# Altium PCB ETML_A4_2L.PcbDoc (part 1 of 2)
Units mm, origin at the board's own origin, x right, y up, seen from the top; angles counter-clockwise.
Board outline 160 x 100 mm, 2 copper layers (Top Layer, Bottom Layer), stack 1.571 mm thick; 99 components, 40 nets, 218 pads, 32 vias.
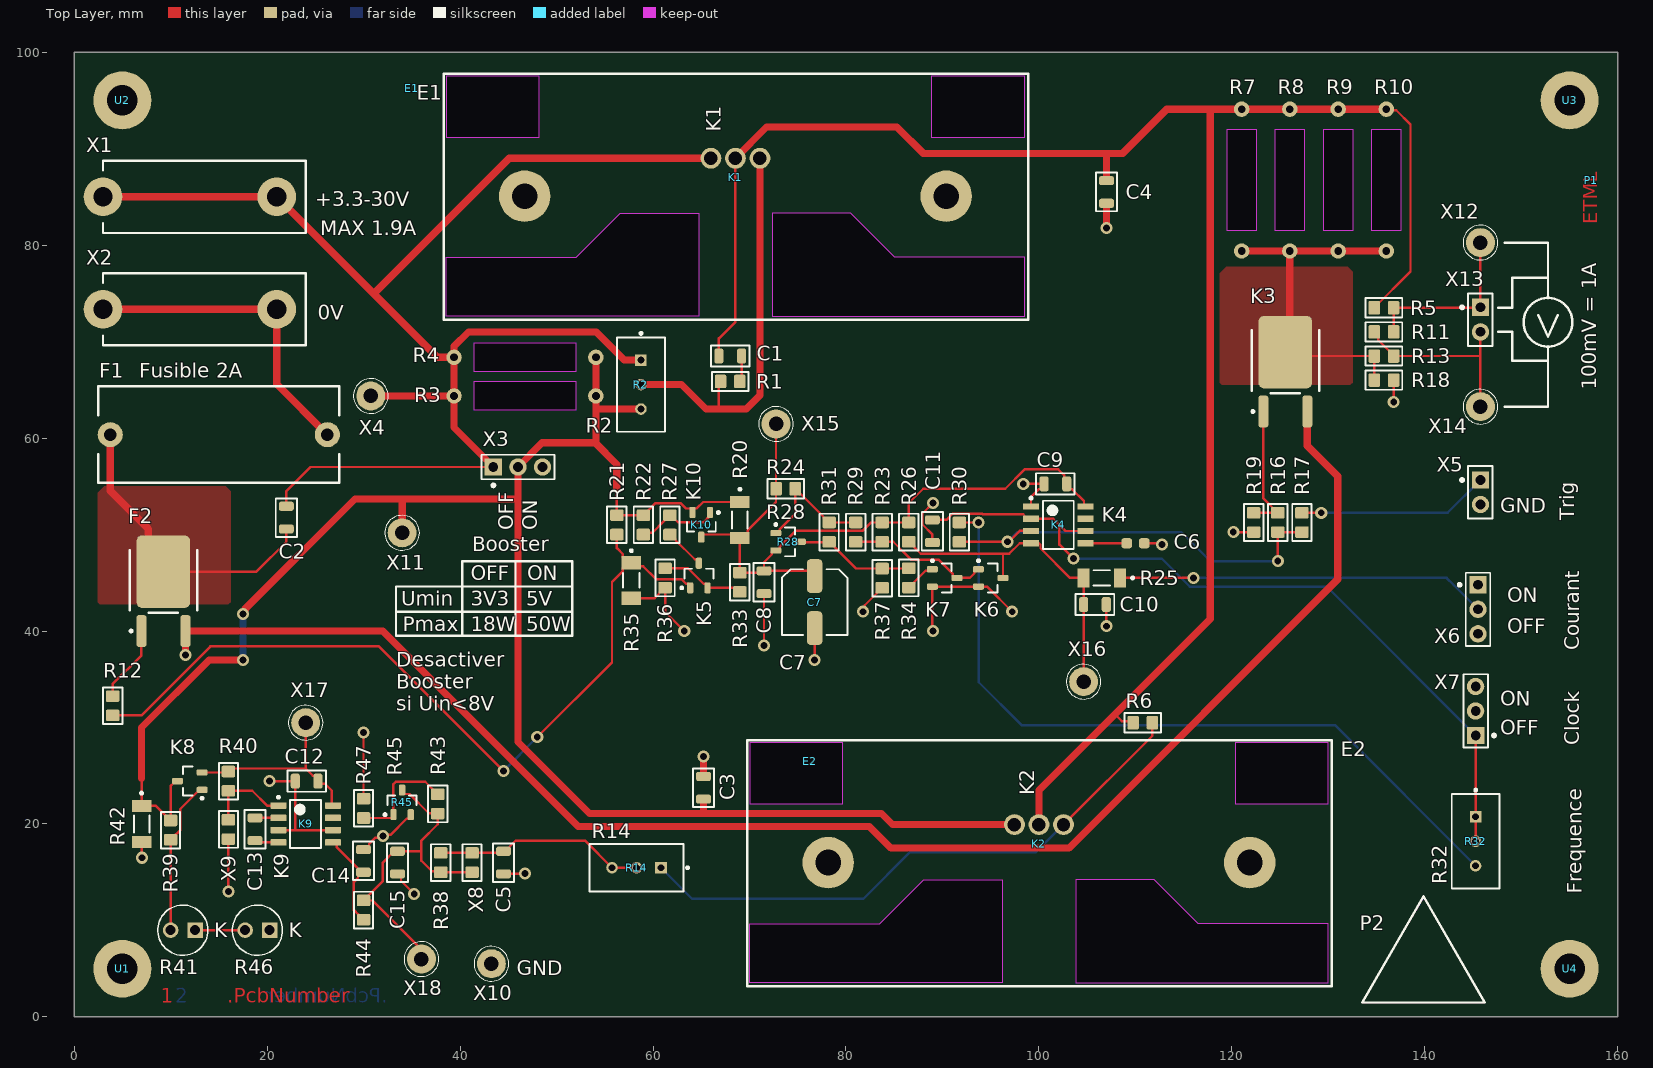
[diagram p0: Top Layer view]
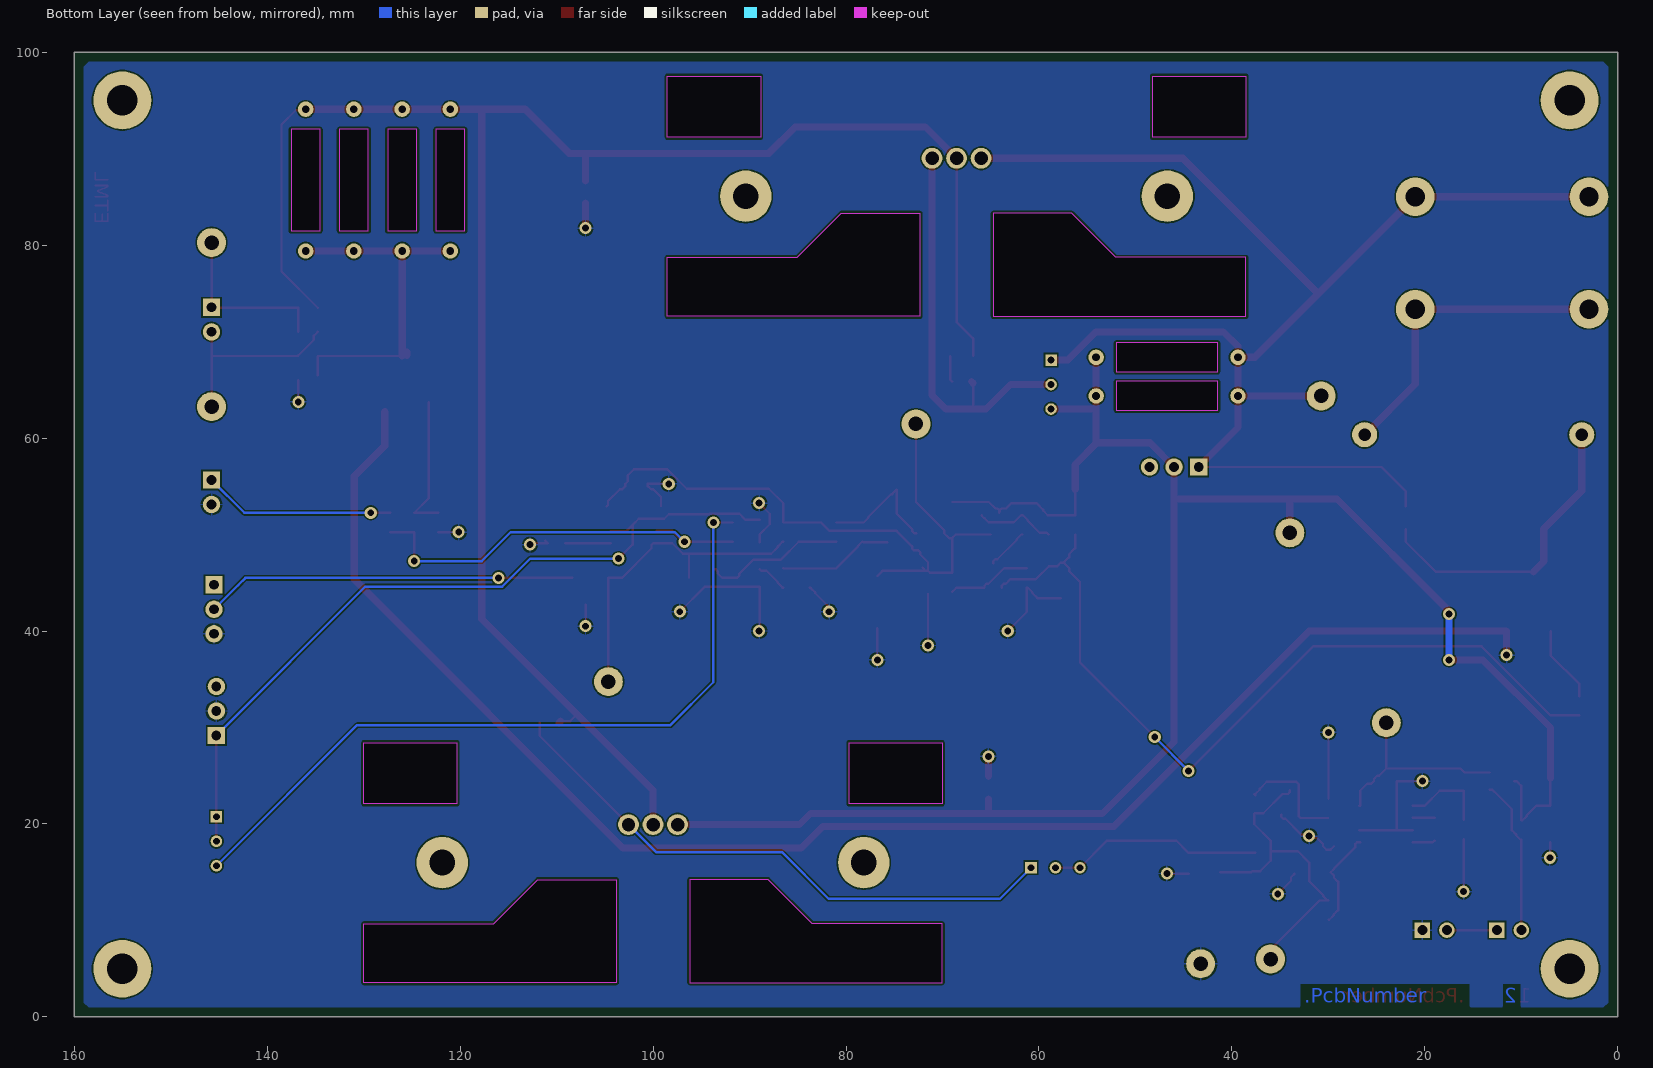
[diagram p1: Bottom Layer view, seen from below]
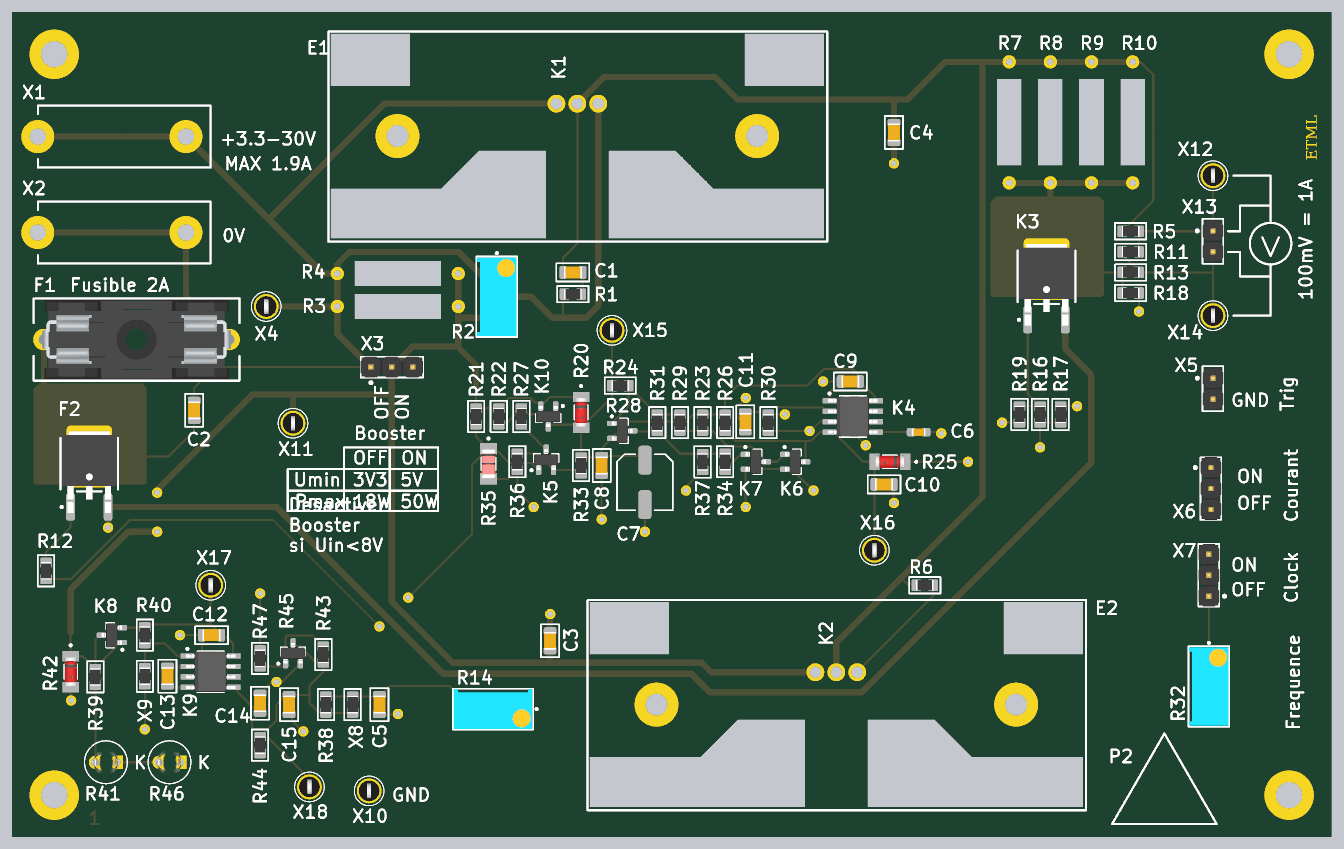
[diagram p2: 3D render of the assembled board from above, using the file's embedded part models]

## Layer stack, top to bottom
Top Solder: solder mask 0.0102, Solder Resist, Dk 3.5
Top Layer: signal copper 0.0356
Dielectric 1: dielectric 1.5, FR-4, Dk 4.8
Bottom Layer: signal copper 0.0356
Bottom Solder: solder mask 0.0102, Solder Resist, Dk 3.5

## Board outline
0,0 160,0 160,100 0,100

## Design rules (kind name [scope] priority, off if disabled: settings)
BoardOutlineClearance [All] p1: gap=0.25 ignorepadtopadclearanceinfootprint=FALSE except(0: Arc-SplitContinuation Track-SplitContinuation SMDPad-SplitContinuation THPad-SplitContinuation Via-SplitContinuation Fill-SplitContinuation Poly-SplitContinuation Region-SplitContinuation Text-SplitContinuation)
Clearance Clearance-xPP-xTP-xTT [All] p1: gap=0.15 ignorepadtopadclearanceinfootprint=FALSE except(0: Arc-Hole Track-Hole SMDPad-Hole THPad-Hole Via-Hole Fill-Hole Poly-Hole Region-Hole Text-Hole)
ComponentClearance [All] p1: gap=0.25 collisioncheckmode=3 verticalgap=0.25 showdistances=FALSE
DiffPairsRouting [All] p1: maxlimit=0.25 minlimit=0.25 mostfreqgap=0.25 toplayer_minwidth=0.381 toplayer_maxwidth=0.381 toplayer_prefwidth=0.381 bottomlayer_minwidth=0.381 bottomlayer_maxwidth=0.381 bottomlayer_prefwidth=0.381 maxuncoupledlength=12.5
Height "Coolers Height" [HasFootprint('TO220 WITH WAKEFIELD THERMAL 678-39-C')] p1: minheight=0 maxheight=65 prefheight=12.5
Height [All] p2: minheight=0 maxheight=25 prefheight=12.5
HoleSize HoleSize-PTH [All] p1: absolutevalues=TRUE maxlimit=6 minlimit=0.25 maxpercent=80.000 minpercent=20.000
HoleToHoleClearance [All] p1: gap=0.35 allowstackedmicrovias=TRUE
MinimumAnnularRing "Minimum IAR" [All] p1: minimumring=0.135
MinimumSolderMaskSliver [All] p1: minsoldermaskwidth=0.08
PlaneClearance PlaneClearance-IPI [All] p1: clearance=0.25
PlaneConnect [All] p1: planeconnectstyle=Relief reliefexpansion=0.175 reliefentries=4 reliefconductorwidth=0.2 reliefairgap=0.2
PolygonConnect PolygonConnect_2 [All vs IsNamedPolygon('NETC2_1_L01_P002')] p1: thpad.connectstyle=Relief thpad.reliefconductorwidth=0.254 thpad.reliefentries=4 thpad.polygonreliefangle="90 Angle" thpad.airgapwidth=0.254 smdpad.connectstyle=Direct smdpad.reliefconductorwidth=0.254 smdpad.reliefentries=4 smdpad.polygonreliefangle="90 Angle" smdpad.airgapwidth=0.254 via.connectstyle=Relief via.reliefconductorwidth=0.254 via.reliefentries=4 via.polygonreliefangle="90 Angle" via.airgapwidth=0.254
PolygonConnect PolygonConnect_1 [All vs IsNamedPolygon('NETK3_2_L01_P001')] p2: thpad.connectstyle=Relief thpad.reliefconductorwidth=0.254 thpad.reliefentries=4 thpad.polygonreliefangle="90 Angle" thpad.airgapwidth=0.254 smdpad.connectstyle=Direct smdpad.reliefconductorwidth=0.254 smdpad.reliefentries=4 smdpad.polygonreliefangle="90 Angle" smdpad.airgapwidth=0.254 via.connectstyle=Relief via.reliefconductorwidth=0.254 via.reliefentries=4 via.polygonreliefangle="90 Angle" via.airgapwidth=0.254
PolygonConnect [All vs IsNamedPolygon('NETK3_2_L01_P001')] p3: thpad.connectstyle=Relief thpad.reliefconductorwidth=0.254 thpad.reliefentries=4 thpad.polygonreliefangle="90 Angle" thpad.airgapwidth=0.254 smdpad.connectstyle=Direct smdpad.reliefconductorwidth=0.254 smdpad.reliefentries=4 smdpad.polygonreliefangle="90 Angle" smdpad.airgapwidth=0.254 via.connectstyle=Relief via.reliefconductorwidth=0.254 via.reliefentries=4 via.polygonreliefangle="90 Angle" via.airgapwidth=0.254
PolygonConnect PolygonConnect-xTW [All] p4: connectstyle=Relief reliefconductorwidth=0.2 reliefentries=4 polygonreliefangle="90 Angle" airgapwidth=0.2
RoutingCorners [All] p1: cornerstyle=45-Degree minsetback=2.5 maxsetback=2.5
RoutingVias "RoutingVias > 0.45mm" [(ObjectKind = 'Via') And (HoleDiameter > AsMM(0.45))] p1: holewidth=0.5 width=0.85 viastyle="Through Hole" minholewidth=0.5 minwidth=0.85 maxholewidth=0.9 maxwidth=1.25 // finishet hole size > 0.45mm
RoutingVias "RoutingVias <= 0.45mm" [(ObjectKind = 'Via') And (HoleDiameter <= AsMM(0.45))] p2: holewidth=0.3 width=0.65 viastyle="Through Hole" minholewidth=0.25 minwidth=0.6 maxholewidth=0.45 maxwidth=0.8 // finishet hole size <= 0.45mm
SilkToSilkClearance [All] p1: silktosilkclearance=0.2
SilkToSolderMaskClearance SilkscreenOverComponentPads [IsPad] p1: minsilkscreentomaskgap=0.2 clearancetoexposedcopper=TRUE
SolderMaskExpansion [All] p1: expansion=0 istentingtop=FALSE
UnRoutedNet [All] p1: checkbadconnections=TRUE
Width Width-xTW [All] p1: maxlimit=1.5 minlimit=0.15 preferedwidth=0.2
18 further rules are at their usual default settings.

## Classes and differential pairs
component class "Timer 555": C6 C7 C8 C9 C10 C11 K4 K5 K6 K7 K10 R20 R21 R22 R23 R24 R25 R26 R27 R28 R29 R30 R31 R32 R33 R34 R35 R36 R37 X6 X7 X15 X16
component class "Schéma bloc": 1 P1 P2 U1 U2 U3 U4 W1 X10
component class "Pompe de charge": C12 C13 C14 C15 K8 K9 R38 R39 R40 R41 R42 R43 R44 R45 R46 R47 X8 X9 X17 X18
component class "Dissipation de puissance": C1 C2 C3 C4 C5 E1 E2 F1 F2 K1 K2 K3 R1 R2 R3 R4 R5 R6 R7 R8 R9 R10 R11 R12 R13 R14 R16 R17 R18 R19 X1 X2 X3 X4 X5 X11 X12 X13 X14

## Components (designator, comment, footprint, x,y, rotation, side; value= is the part's Value field where it differs from the comment)
C1 "100nF" CAPC2012X08M 68,68.5 r0 top
C2 "100nF" CAPC2012X08M 22,51.75 r90 top
C3 "100nF" CAPC2012X08M 65.232,23.75 r270 top
C4 "100nF" CAPC2012X08M 107,85.5 r90 top
C5 "1uF" CAPC2012X08M 44.5,16 r90 top value=1µF
C6 "10nF" CAPC1608X08M 110,49.095 r180 top
C7 "220uF 16V" NIC-CAPA2-6.3X7.7_V 76.75,43 r270 top
C8 "1uF" CAPC2012X08M 71.5,45.05 r90 top value=1µF
C9 "100nF" CAPC2012X08M 101.7,55.25 r0 top
C10 "1uF" CAPC2012X08M 105.8,42.75 r180 top value=1µF
C11 "100nF" CAPC2012X08M 88.95,50.345 r90 top
C12 "1uF" CAPC2012X08M 24.103,24.44 r0 top value=1µF
C13 "1uF" CAPC2012X08M 18.75,19.46 r90 top value=1µF
C14 "1uF" CAPC2012X08M 30,16.175 r270 top value=1µF
C15 "1uF" CAPC2012X08M 33.525,16 r90 top value=1µF
E1 "WAKEFIELD THERMAL 678-39-C" Designator 35,96.25 r0 top
E2 "WAKEFIELD THERMAL 678-39-C" Designator 76.225,26.5 r0 top
F1 "2A" WE_696103201002 15,60.346 r180 top value=5x20mm
F2 "IRLR7843" DPAK228P991X238-3M 9.257,44.15 r90 top
K1 "BD912" "TO220 WITH WAKEFIELD THERMAL 678-39-C" 68.54,85.063 r0 top
K2 "LM317T" "TO220 WITH WAKEFIELD THERMAL 678-39-C" 100,16 r0 top
K3 "IRLR7843" DPAK228P991X238-3M 125.53,66.9 r90 top
K4 "TLC555CDR" D0008A_M 102,51 r0 top
K5 "BC847C" SOT90P240X110-3M 64.75,45.75 r90 top
K6 "BC847C" SOT90P240X110-3M 95,45.5 r0 top
K7 "BC847C" SOT90P240X110-3M 90.225,45.5 r0 top
K8 "BC847C" SOT90P240X110-3M 12,24.44 r180 top
K9 "LM2662M" D0008A_M 24,20 r0 top
K10 "BC857CLT1G" SOT90P240X110-3M 65,51 r270 top
P1 "ETML-CU" DRAW-ETML-CU 157.25,86.73 r90 top
P2 "Sticker" "Sticker surface chaude" 133.5,1.5 r0 top
R1 "150R" RESC2012X06M 68,65.86 r0 top value=150
R2 "200R" FP-3296W-MFG 58.755,65.54 r90 top
R3 "3R3 1W" "NEOHM 1W ROX1S" 46.73,64.36 r0 top value=3.3
R4 "3R3 1W" "NEOHM 1W ROX1S" 46.73,68.36 r0 top value=3.3
R5 "22k" RESC2012X06M 135.75,73.5 r0 top
R6 "220R" RESC2012X06M 110.75,30.5 r180 top value=220
R7 "2R2 1W" "NEOHM 1W ROX1S" 121,86.73 r90 top value=2.2
R8 "2R2 1W" "NEOHM 1W ROX1S" 126,86.73 r90 top value=2.2
R9 "2R2 1W" "NEOHM 1W ROX1S" 131,86.73 r90 top value=2.2
R10 "2R2 1W" "NEOHM 1W ROX1S" 136,86.73 r90 top value=2.2
R11 "10k" RESC2012X06M 135.75,71 r0 top
R12 "10k" RESC2012X06M 4,32.25 r90 top
R13 "22k" RESC2012X06M 135.75,68.5 r0 top
R14 "200R" FP-3296W-MFG 58.29,15.463 r0 top
R16 "1K8" RESC2012X06M 124.75,51.25 r270 top value=1.8k
R17 "47k" RESC2012X06M 127.25,51.25 r90 top
R18 "220R" RESC2012X06M 135.75,66 r180 top value=220
R19 "220k" RESC2012X06M 122.25,51.25 r90 top
R20 "LL4448-GS08" FP-6_560-5005_01-4-MFG 69,51.5 r270 top value=4pF
R21 "10k" RESC2012X06M 56.25,51 r90 top
R22 "220k" RESC2012X06M 59,51 r90 top
R23 "47k" RESC2012X06M 83.75,50.25 r90 top
R24 "100k" RESC2012X06M 73.75,54.75 r180 top
R25 "LL4448" FP-6_560-5005_01-4-MFG 106.5,45.5 r180 top value=4pF
R26 "150k" RESC2012X06M 86.5,50.25 r90 top
R27 "1k0" RESC2012X06M 61.75,51 r90 top value=1k
R28 "LM4041-ADJ" SOT90P240X110-3M 74,49.25 r0 top
R29 "1M" RESC2012X06M 81,50.25 r90 top
R30 "1k0" RESC2012X06M 91.75,50.25 r270 top value=1k
R31 "180k" RESC2012X06M 78.25,50.25 r90 top
R32 "250K" FP-3296W-MFG 145.255,18.21 r90 top value=250kΩ
R33 "2k7" RESC2012X06M 69,45.05 r90 top value=2.7k
R34 "22k" RESC2012X06M 86.5,45.5 r270 top
R35 "BZV55C5V6" FP-DO-213AA-MFG 57.75,45.25 r270 top
R36 "10k" RESC2012X06M 61.25,45.5 r90 top
R37 "5k6" RESC2012X06M 83.75,45.475 r90 top value=5.6k
R38 "2R2" RESC2012X06M 38,16 r90 top value=2.2
R39 "8k2" RESC2012X06M 10,19.365 r270 top value=8.2k
R40 "330k" RESC2012X06M 16,24.44 r90 top
R41 "HLMP-1790" FP-6_544-5255_01-4-MFG 11.275,9 r180 top
R42 "LL4448-GS08" FP-6_560-5005_01-4-MFG 7,20 r270 top value=4pF
R43 "3k3" RESC2012X06M 37.687,22.08 r270 top value=3.3k
R44 "180R" RESC2012X06M 30,11.08 r90 top value=180
R45 "LM4041-ADJ" SOT90P240X110-3M 34,22.25 r90 top
R46 "HLMP-1790" FP-6_544-5255_01-4-MFG 19,9 r180 top
R47 "330k" RESC2012X06M 30,21.62 r270 top
U1 "3.2" MECH-PHD320 5,5 r90 top
U2 "3.2" MECH-PHD320 5,95 r90 top
U3 "3.2" MECH-PHD320 155,95 r90 top
U4 "3.2" MECH-PHD320 155,5 r90 top
X1 "4mm/RD" SKS_973582101 12,85 r180 top
X2 "4mm/BK" SKS_973582100 12,73.346 r180 top
X3 "2.54" PIN-1x03-2.54 43.46,57 r0 top
X4 "5002" Keystone_5002 30.75,64.36 r90 top
X5 "2.54" PIN-1x02-2.54 145.75,55.65 r270 top
X6 "2.54" PIN-1x03-2.54 145.5,44.79 r270 top
X7 "2.54" PIN-1x03-2.54 145.25,29.17 r90 top
X8 "Solder bridge" "Solder brige" 41.242,16 r270 top
X9 "Solder bridge" "Solder brige" 16,19.44 r90 top
X10 "5001" Keystone_5001 43.25,5.519 r90 top
X11 "5002" Keystone_5002 34,50.179 r90 top
X12 "5002" Keystone_5002 145.75,80.25 r90 top
X13 "2.54" PIN-1x02-2.54 145.75,73.54 r270 top
X14 "5002" Keystone_5002 145.75,63.25 r90 top
X15 "5002" Keystone_5002 72.75,61.461 r90 top
X16 "5002" Keystone_5002 104.625,34.75 r90 top
X17 "5002" Keystone_5002 24.004,30.5 r90 top
X18 "5002" Keystone_5002 36,6 r90 top

## Footprints (in the part's own frame and the unit in brackets; to place one, negate y for a bottom-side part, rotate by r counter-clockwise, add the part's x,y. Pads: shape width x height; smd on the part's side, far side on the other; paste and mask are expansions set on the pad)
CAPC1608X08M [mm] "Chip Capacitor, 2-Leads, Body 1.60x0.80mm, IPC Low Density"
  rrect50% 1.1x1.05 smd: 1(-0.9,0) 2(0.9,0)
  body extent -0.85,-0.45 0.85,0.45, height 0.8
CAPC2012X08M [mm] "Chip Capacitor, 2-Leads, Body 2.00x1.25mm, IPC Low Density"
  rrect50% 0.95x1.55 smd: 1(-1.175,0) 2(1.175,0)
  silkscreen extent -2,-1.1 2,1.1, body extent -1.1,-0.72 1.1,0.72, height 0.85
D0008A_M [mm] "SOIC, 8-Leads, Body 5x4mm, Pitch 1.27mm, IPC Low Density"
  rrect15% 1.65x0.65 smd: 1(-2.825,1.905) 2(-2.825,0.635) 3(-2.825,-0.635) 4(-2.825,-1.905) 5(2.825,-1.905) 6(2.825,-0.635) 7(2.825,0.635) 8(2.825,1.905)
  silkscreen extent -2.95,-2.5 1.6,2.9, body extent -3,-2.45 3,2.45, height 1.63
Designator [mm]
DPAK228P991X238-3M [mm] "D-PAK, 3-Pads, Body 6.21x6.73mm (max), IPC Low Density"
  rrect50% 3.3x1.05 smd: 1(-4.15,2.28) 3(-4.15,-2.28)
  rrect40% 2.5x2 on Top Paste: 2(0.25,1.25) 2(0.25,-1.25) 2(3.75,-1.25) 2(3.75,1.25)
  rrect20% 7.5x5.55 smd paste-100: 2(2,0)
  silkscreen extent -4.27,-3.5 4.25,3.5, body extent -4.85,-3.37 5.06,3.38, height 2.38
DRAW-ETML-CU [mm] "Logo ETML cuivre"
FP-6_544-5255_01-4-MFG [mm]
  round 1.6 hole 1.05 paste-1000 mask+0: A(1.27,0)
  rect 1.6x1.6 hole 1.05 paste-1000 mask+0: K(-1.27,0)
  silkscreen extent -2.6,-2.6 2.6,2.6, body extent -2.32,-2.32 2.32,2.32, height 0.25
FP-6_560-5005_01-4-MFG [mm]
  rect 1.25x2 smd paste+0 mask+0: 1(-1.875,0) 2(1.875,0)
  silkscreen extent -3.32,-0.8 0.87,0.8, body extent -2.6,-1.1 2.6,1.1, height 0.25
FP-3296W-MFG [mm]
  rect 1.2x1.2 hole 0.7 paste-1000 mask+0: 1(2.54,0.005)
  round 1.2 hole 0.7 paste-1000 mask+0: 2(0,0.005) 3(-2.54,0.01)
  silkscreen extent -4.89,-2.48 5.42,2.48, body extent -4.99,-2.58 4.99,2.58, height 0.25
FP-DO-213AA-MFG [mm]
  rect 1.4x2.03 smd paste+0 mask+0: 1(-1.84,0) 2(1.84,0)
  silkscreen extent -3.2,-0.85 0.76,0.85, body extent -2.64,-1.11 2.64,1.11, height 0.25
Keystone_5001 [mm]
  round 3 hole 1.5 paste-100: 1(0,0)
  silkscreen extent -1.8,-1.8 1.8,1.8, body extent -1.27,-1.27 1.27,1.27, height 4.57
Keystone_5002 [mm]
  round 3 hole 1.5 paste-100: 1(0,0)
  silkscreen extent -1.8,-1.8 1.8,1.8, body extent -1.27,-1.27 1.27,1.27, height 4.57
MECH-PHD320 [mm] "Plated hole 3.4mm"
  round 6 hole 3.2 paste-100: 1(0,0)
"NEOHM 1W ROX1S" [mm] "THT, resistor"
  round 1.6 hole 0.8: 1(-7.35,0) 2(7.35,0)
  Keep-Out Layer board cut-out: -5.25,1.5 5.25,1.5 5.25,-1.5 -5.25,-1.5
  body extent -5,-1.08 5,1.08, height 1.08
NIC-CAPA2-6.3X7.7_V [mm] "Aluminum Electrolytic Capacitor, Diameter 6.3mm, Height 8mm, Pitch 5.4mm"
  rrect50% 3.5x1.6 smd: 1(-2.7,0) 2(2.7,0)
  silkscreen extent -3.4,-3.4 3.4,3.4, body extent -3.14,-3.12 3.14,3.15, height 8
PIN-1x02-2.54 [mm] ".025 SQ Post Terminal Strip Assembly, 1x2 Pins, Vertical, 2.54mm Pitch, Male"
  rect 1.8x1.8 hole 1: 1(0,0)
  round 1.8 hole 1: 2(2.54,0)
  silkscreen extent -1.46,-2.05 4,1.27, body extent -1.27,-1.27 3.81,1.27, height 8.6
PIN-1x03-2.54 [mm] ".025 SQ Post Terminal Strip Assembly, 1x3 Pins, Vertical, 2.54mm Pitch, Male"
  rect 1.8x1.8 hole 1: 1(0,0)
  round 1.8 hole 1: 2(2.54,0) 3(5.08,0)
  silkscreen extent -1.25,-2.05 6.35,1.27, body extent -1.27,-1.27 6.35,1.27, height 8.6
RESC2012X06M [mm] "Chip Resistor, 2-Leads, Body 2.00x1.25mm, IPC Low Density"
  rrect25% 1.2x1.4 smd: 1(-1,0) 2(1,0)
  silkscreen extent -1.9,-1 1.9,1, body extent -1.05,-0.63 1.05,0.63, height 0.6
SKS_973582100 [mm] "4mm BLACK"
  round 4 hole 2: 1(-9,0) 1(9,0)
  silkscreen extent -12,-3.75 9,3.75, body extent -12.12,-3.87 9.12,3.87, height 10.5
SKS_973582101 [mm] "4mm RED"
  round 4 hole 2: 1(-9,0) 1(9,0)
  silkscreen extent -12,-3.75 9,3.75, body extent -12.12,-3.87 9.12,3.87, height 10.5
"Solder brige" [mm] "Chip Resistor, 2-Leads, Body 2.00x1.25mm, IPC Low Density"
  rrect25% 1.2x1.4 smd: 1(-1,0) 2(1,0)
  silkscreen extent -1.9,-1 1.9,1, body extent -1.05,-0.63 1.05,0.63, height 0.6
SOT90P240X110-3M [mm] "SOT23, 3-Leads, Body 2.90x2.40mm, Pitch 0.90mm, IPC Low Density"
  rrect50% 1.15x0.65 smd: 1(-1.275,0.9) 2(-1.275,-0.9) 3(1.275,0)
  silkscreen extent -1.4,-1.5 0.7,1.9, body extent -1.25,-1.5 1.25,1.5, height 1.1
"Sticker surface chaude" [mm]
  Top Layer keep-out region: 0,0 12.7,0 10.414,3.937 6.35,10.922 2.032,3.556
  silkscreen extent 0,0 12.7,11
"TO220 WITH WAKEFIELD THERMAL 678-39-C" [mil]
  round 210 hole 105: 0(-860,0) 0(860,0)
  round 85 hole 55: 1(100,155) 2(0,155) 3(-100,155)
  Keep-Out Layer board cut-out: 1180,-490 1180,-250 650,-250 470,-70 150,-70 150,-490
  Keep-Out Layer board cut-out: -1180,490 -1180,240 -800,240 -800,490
  Keep-Out Layer board cut-out: 800,490 800,240 1180,240 1180,490
  Keep-Out Layer board cut-out: -1180,-490 -1180,-250 -650,-250 -470,-70 -150,-70 -150,-490
  silkscreen extent -1190,-505 1195,500, body extent -1180,-490 1180,490, height 1520
WE_696103201002 [mm] "FUSE Holder 5x20mm"
  round 2.6 hole 1.3: 1(-11.25,0) 2(11.25,0)
  silkscreen extent -12.5,-5 12.5,5, body extent -12.05,-4.8 12.05,4.8, height 11.5

## Part data
C1 C2 C3 C4 C9 C11: library part CMP-065-000038-2, "CAPC 100nF X7R 50V 10% 2012 (0805 INCH)", Dielectric=X7R, Manufacturer=TDK, Manufacturer Number=C2012X7R1H104K085AA, Supplier Part Number 1=581-KAM21AR81H104KU, TemperatureRange="-55°C to +125°C", Tolerance=±10%, Voltage=50V, Category=Passives, IsStocked=1, PN=KAM21AR81H104KU, SubCategory="Condensateurs ceramique", Supplier 1=Mouser, Supplier Price 1=0.259
C5 C8 C10 C12 C13 C14 C15: library part CMP-065-000041-2, "CAPC 1uF X5R 25V 10% 2012 (0805 INCH)", Dielectric=X5R, Manufacturer=TDK, Manufacturer Number=KGM21AR51E105KU, Supplier Part Number 1=581-KGM21AR51E105KU, TemperatureRange="-55°C to +85°C", Tolerance=±10%, Voltage=25V, Category=Passives, IsStocked=1, PN=KGM21AR51E105KU, SubCategory="Condensateurs ceramique", Supplier 1=Mouser, Supplier Price 1=1
C6: library part CMP-065-000010-2, "CAPC 10nF X7R 50V 10% 1608 (0603 INCH)", Dielectric=X7R, Manufacturer=TDK, Manufacturer Number=C1608X7R1H103K080AA, Supplier Part Number 1="FAB.0603_C 10nF", TemperatureRange="-55°C to +125°C", Tolerance=±10%, Voltage=50V, Category=Passives, IsStocked=1, PN=PN-514948, SubCategory="Condensateurs ceramique", Supplier 1=ETML, Supplier Price 1=0.0123
C7: library part CMP-0687-00060-1_2, "Aluminum Electrolytic Capacitor, UD Series, Low Impedance, 220 uF, 16 V, + / - 20%, -55 to 105 degC, Chip Type, 6.3 x 7.7 mm D x L, Pb-Free, Reel", Manufacturer=Nichicon, PartNumber=UUD1C221MCL1GS, Rated Capacitance="220 uF", Rated Ripple Current (at 100kHz)="280 mA", Rated Voltage="16 V", Tolerance Rated Capacitance="-20 to 20%", ComponentLink1Description="Manufacturer URL", ComponentLink1URL=http://www.nichicon.co.jp/, ComponentLink2Description=Datasheet, ComponentLink2URL=http://products.nichicon.co.jp/en/pdf/XJA043/e-ud.pdf, ComponentLink3Description="Package Specification", ComponentLink3URL=http://products.nichicon.co.jp/en/pdf/XJA043/e-ud.pdf, DatasheetVersion=08/2012, Diameter="6.3 mm", Endurance Time="2000 h", Impedance="0.34 Ohm", Length="7.7 mm", Mounting Technology="Surface Mount", PackageDescription="2-Pin Surface Mount Device, Diameter 6.3 mm, Height 7.7 mm, Pitch 5.4 mm", PackageReference=CAPAE-D6.3H7.7, Packing="Dia382mm Reel", RoHS=TRUE
E1 E2: "HEAT SINK, ALUMINIUM, TO-PACKAGE, SMD"
F1: library part CMP-067-000003-1, "Fusible FST 2A temporisé", Manufacturer="Würth Electronik", Manufacturer Number=696103201002, Supplier Part Number 1="MAG 261.476", TemperatureRange="-30°C to +120°C", Voltage=250VAC, Category=Protections, Current=2A, IsStocked=True, PN=261.476, SubCategory=Fusibles, Supplier 1=ETML, Supplier Price 1=0.33
F2 K3: "N channel Mosfet"
K1: "PNP transistor"
K2: "TO-220 ajustable votage regulator"
K4: library part CMP-04857-000001-1, "IC OSC SGL TIMER 2.1MHZ 8-SOIC", Case/Package=SOIC, Current Rating=250A, Frequency=2.1MHz, High Level Output Current=-10mA, Low Level Output Current=100mA, Max Operating Temperature=125°C, Max Power Dissipation=725mW, Max Supply Voltage=15V, Min Operating Temperature=-40°C, Min Supply Voltage=2V, Operating Supply Current=360uA, Package Quantity=2500, Quiescent Current=250uA, Supplier Part Number 1=595-TLC555CDR, Height=1.58mm, IsStocked=1, Lead Free="Lead Free", Length=4.9mm, Mount="Surface Mount", Number of Channels=1, Number of Pins=8, Number of Timers/Counters=1, Packaging="Tape and Reel", PN=TLC555CDR, Power Dissipation=725mW, Radiation Hardening=No, REACH SVHC="No SVHC", Supplier 1=Mouser, Supplier Price 1=0.553, Termination=SMD/SMT, Weight=0.002561oz, Width=3.91mm
K5 K6 K7 K8: "NPN general purpose transistor"
K9: "Switched Capacitor Voltage Converter, 8-pin Narrow SOIC", Manufacturer="Texas Instruments", PackageTopMarking=NSZXTT*LM26*62M, PowerWise=N, Supplier Part Number 1=9306803, Code_IPC=SOIC127P600-8, Code_JEDEC=MS-012-AA, ComponentLink1Description="Datasheet URL", ComponentLink1URL=http://www.ti.com/general/docs/lit/getliterature.tsp?genericPartNumber=LM2662&fileType=pdf, CompType="Switch Caps", IsStocked=1, PackageDescription="SOIC Narrow, 4.9 x 3.9 x 1.45mm, 8 Lead, 1.27mm Pitch", PackageReference=D0008A, PinCount=8, PN=LM2662M, RoHS=N, Supplier 1=Farnell, Supplier Price 1=2.51
K10: library part CMP-1048-00802-1, "General Purpose Transistor, PNP Silicon, 3-Pin SOT-23, Pb-Free, Tape and Reel", Manufacturer="On Semiconductor", ComponentLink1Description="Manufacturer URL", ComponentLink1URL=http://www.onsemi.com/, ComponentLink2Description=Datasheet, ComponentLink2URL=http://www.onsemi.cn/pub_link/Collateral/BC856ALT1-D.PDF, ComponentLink3Description="Package Specification", ComponentLink3URL=http://www.onsemi.cn/pub_link/Collateral/318-08.PDF, DatasheetVersion="Rev. 13", fT Min (MHz)=100, IC Continuous (A)=-0.1, Mounting Technology="Surface Mount", PackageDescription="3-Pin Small Outline Transistor, Body 2.92 x 1.3 mm, Pitch 0.95 mm", PackageReference=SOT-23-3-318-08, PackageVersion="Rev. AP, 11/2009", Packing="Tape and Reel", PartNumber=BC857CLT1G, Polarity=PNP, RoHS=TRUE
P1: library part CMP-064-000000-1, "Logo ETML", Category=Others, IsStocked=False, PN=PN-439033, SubCategory=Dessins
P2: library part "Sticker Surface chaude ISO7010", "PIC W017-TRI 015-PE-SHEET/1", Supplier Part Number 1=302-20-433, IsStocked=1, PN="PIC W017-TRI 015-PE-SHEET/1", Supplier 1=Distrelec, Supplier Price 1=0.246
R1: library part CMP-066-000177-2, "RES 150ohm  ±1% 0.125W 2012 (0805 INCH)", Manufacturer=Yageo, Manufacturer Number=RC0805FR-07150RL, Power=0.125W, Supplier Part Number 1="FAB.0805_R 150R", TemperatureCoeff=±200ppm/°C, TemperatureRange="-55°C to 155°C", Tolerance=±1%, Voltage=150V, Category=Passives, IsStocked=1, PN=PN-455993, SubCategory="Resistances couche epaisse", Supplier 1=ETML, Supplier Price 1=0.0200
R2 R14: library part CMP-066-000235-2, "RESADJ 200ohm Cermet 25 turns", Manufacturer="Bourns Incorporated", Power=500mW, Supplier Part Number 1=9353747, TemperatureCoeff=±100ppm/°C, TemperatureRange="-55°C to +125°C", Tolerance=±10%, Category=Passives, IsStocked=1, PN=PN-614445, SubCategory="Resistances ajustables", Supplier 1=Farnell, Supplier Price 1=3.36
R3 R4: library part "NEOHM - TE CONNECTIVITY ROX1SJ3R3", "Résistance traversante, 3.3 ohm, ROX, 1 W, ± 5%, Axial, 350 V", Manufacturer=Vishay, Manufacturer Number=MRS25000C3308FCT00, Power=0.6W, Supplier Part Number 1=3399704, TemperatureCoeff=±50ppm/°C, TemperatureRange="-55°C to 155°C", Tolerance=±1%, Voltage=350V, Category=Passives, IsStocked=1, PN=PN-918915, SubCategory="Resistances film metallique", Supplier 1=Farnell, Supplier 2=Mouser, Supplier 3=Digikey, Supplier Part Number 2=279-ROX1SJ3R3, Supplier Part Number 3=A131468CT-ND, Supplier Price 1=0.1500
R5 R13 R34: library part CMP-066-000203-2, "RES 22kohm  ±1% 0.125W 2012 (0805 INCH)", Manufacturer=Yageo, Manufacturer Number=RC0805FR-0722KL, Power=0.125W, Supplier Part Number 1="FAB.0805_R 22k", TemperatureCoeff=±200ppm/°C, TemperatureRange="-55°C to 155°C", Tolerance=±1%, Voltage=150V, Category=Passives, IsStocked=1, PN=PN-851075, SubCategory="Resistances couche epaisse", Supplier 1=ETML, Supplier Price 1=0.0200
R6 R18: library part CMP-066-000179-2, "RES 220ohm  ±1% 0.125W 2012 (0805 INCH)", Manufacturer=Yageo, Manufacturer Number=RC0805FR-07220RL, Power=0.125W, Supplier Part Number 1="FAB.0805_R 220R", TemperatureCoeff=±200ppm/°C, TemperatureRange="-55°C to 155°C", Tolerance=±1%, Voltage=150V, Category=Passives, IsStocked=1, PN=PN-694076, SubCategory="Resistances couche epaisse", Supplier 1=ETML, Supplier Price 1=0.0200
R7 R8 R9 R10: library part "NEOHM - TE CONNECTIVITY ROX1SJ2R2", "Résistance traversante, 2.2 ohm, ROX, 1 W, ± 5%, Axial, 350 V", Manufacturer=Vishay, Manufacturer Number=MRS25000C3308FCT00, Power=0.6W, Supplier Part Number 1=3399704, TemperatureCoeff=±50ppm/°C, TemperatureRange="-55°C to 155°C", Tolerance=±1%, Voltage=350V, Category=Passives, IsStocked=1, PN=PN-918915, SubCategory="Resistances film metallique", Supplier 1=Farnell, Supplier 2=Mouser, Supplier 3=Digikey, Supplier Part Number 2=279-ROX1SJ3R3, Supplier Part Number 3=A131468CT-ND, Supplier Price 1=0.1500
R11 R12 R21 R36: library part CMP-066-000199-2, "RES 10kohm  ±1% 0.125W 2012 (0805 INCH)", Manufacturer=Yageo, Manufacturer Number=RC0805FR-0710KL, Power=0.125W, Supplier Part Number 1="FAB.0805_R 10k", TemperatureCoeff=±200ppm/°C, TemperatureRange="-55°C to 155°C", Tolerance=±1%, Voltage=150V, Category=Passives, IsStocked=1, PN=PN-374909, SubCategory="Resistances couche epaisse", Supplier 1=ETML, Supplier Price 1=0.0200
R16: library part CMP-066-000190-2, "RES 1.8kohm  ±1% 0.125W 2012 (0805 INCH)", Manufacturer=Yageo, Manufacturer Number=RC0805FR-071K8L, Power=0.125W, Supplier Part Number 1="FAB.0805_R 1K8", TemperatureCoeff=±200ppm/°C, TemperatureRange="-55°C to 155°C", Tolerance=±1%, Voltage=150V, Category=Passives, IsStocked=1, PN=PN-653534, SubCategory="Resistances couche epaisse", Supplier 1=ETML, Supplier Price 1=0.0200
R17 R23: library part CMP-066-000207-2, "RES 47kohm  ±1% 0.125W 2012 (0805 INCH)", Manufacturer=Yageo, Manufacturer Number=RC0805FR-0747KL, Power=0.125W, Supplier Part Number 1="FAB.0805_R 47k", TemperatureCoeff=±200ppm/°C, TemperatureRange="-55°C to 155°C", Tolerance=±1%, Voltage=150V, Category=Passives, IsStocked=1, PN=PN-427242, SubCategory="Resistances couche epaisse", Supplier 1=ETML, Supplier Price 1=0.0200
R19 R22: library part CMP-066-000215-2, "RES 220kohm  ±1% 0.125W 2012 (0805 INCH)", Manufacturer=Yageo, Manufacturer Number=RC0805FR-07220KL, Power=0.125W, Supplier Part Number 1="FAB.0805_R 220k", TemperatureCoeff=±200ppm/°C, TemperatureRange="-55°C to 155°C", Tolerance=±1%, Voltage=150V, Category=Passives, IsStocked=1, PN=PN-479575, SubCategory="Resistances couche epaisse", Supplier 1=ETML, Supplier Price 1=0.0200
R20 R42: "DIODE GEN PURP 75V 150MA SOD80", Capacitance=4pF, Forward Current=300mA, Manufacturer="Vishay Small Signal", Max Junction Temp=+175°C, Max Repetitive Reverse Voltage=100V, Max Surge Forward Current=2A, Package=6.560-5005.01-4, Peak Reverse Current=5uA, Reverse Voltage=75V, Temperature="to +175°C", Automotive=Yes, Automotive Grade="Grade 0", Category=Diode, ComponentLink2Description=Datasheet, ComponentLink2URL=http://www.vishay.com/docs/85557/ll4148.pdf, Device Class L1="Discrete Semiconductors", Device Class L2=Diodes, Device Class L3="Rectifier Diodes", Digikey Description="DIODE GEN PURP 75V 150MA SOD80", Height=1.6mm, Lead Free=Yes, Manufacturer Part Number=LL4448-GS08, Mouser Description="Diodes - General Purpose, Power, Switching 100 Volt 100mA", Octopart=https://octopart.com/ll4448-gs08-vishay+small+signal-40886, RoHS=TRUE, Temperature Range High=+175°C
R24: library part CMP-066-000211-2, "RES 100kohm  ±1% 0.125W 2012 (0805 INCH)", Manufacturer=Yageo, Manufacturer Number=RC0805FR-07100KL, Power=0.125W, Supplier Part Number 1="FAB.0805_R 100k", TemperatureCoeff=±200ppm/°C, TemperatureRange="-55°C to 155°C", Tolerance=±1%, Voltage=150V, Category=Passives, IsStocked=1, PN=PN-903408, SubCategory="Resistances couche epaisse", Supplier 1=ETML, Supplier Price 1=0.0200
R25: library part LL4448-GS08, "DIODE GEN PURP 75V 150MA SOD80", Capacitance=4pF, Forward Current=300mA, Manufacturer="Vishay Small Signal", Max Junction Temp=+175°C, Max Repetitive Reverse Voltage=100V, Max Surge Forward Current=2A, Package=6.560-5005.01-4, Peak Reverse Current=5uA, Reverse Voltage=75V, Temperature="to +175°C", Automotive=Yes, Automotive Grade="Grade 0", Category=Diode, ComponentLink2Description=Datasheet, ComponentLink2URL=http://www.vishay.com/docs/85557/ll4148.pdf, Device Class L1="Discrete Semiconductors", Device Class L2=Diodes, Device Class L3="Rectifier Diodes", Digikey Description="DIODE GEN PURP 75V 150MA SOD80", Height=1.6mm, Lead Free=Yes, Manufacturer Part Number=LL4448-GS08, Mouser Description="Diodes - General Purpose, Power, Switching 100 Volt 100mA", Octopart=https://octopart.com/ll4448-gs08-vishay+small+signal-40886, RoHS=TRUE, Temperature Range High=+175°C
R26: library part CMP-066-000213-2, "RES 150kohm  ±1% 0.125W 2012 (0805 INCH)", Manufacturer=Yageo, Manufacturer Number=RC0805FR-07150KL, Power=0.125W, Supplier Part Number 1="FAB.0805_R 150k", TemperatureCoeff=±200ppm/°C, TemperatureRange="-55°C to 155°C", Tolerance=±1%, Voltage=150V, Category=Passives, IsStocked=1, PN=PN-241492, SubCategory="Resistances couche epaisse", Supplier 1=ETML, Supplier Price 1=0.0200
R27 R30: library part CMP-066-000187-2, "RES 1.0kohm  ±1% 0.125W 2012 (0805 INCH)", Manufacturer=Yageo, Manufacturer Number=RC0805FR-071KL, Power=0.125W, Supplier Part Number 1="FAB.0805_R 1k0", TemperatureCoeff=±200ppm/°C, TemperatureRange="-55°C to 155°C", Tolerance=±1%, Voltage=150V, Category=Passives, IsStocked=1, PN=PN-746409, SubCategory="Resistances couche epaisse", Supplier 1=ETML, Supplier Price 1=0.0200
R28 R45: library part LM4041, "Precision Micropower Shunt Voltage Reference, 3-pin SOT-23", Manufacturer="Texas Instruments", PackageTopMarking=RAC*XTT, PowerWise=N, ComponentLink1Description="Datasheet URL", ComponentLink1URL=http://www.ti.com/general/docs/lit/getliterature.tsp?genericPartNumber=LM4041-N&fileType=pdf, CompType="Voltage Reference IC", DatasheetVersion=Mar-2005, PackageDescription="Molded SOT-23, .115 x .051 x .037in Body, 3 Lead, .075 in Pitch", PackageReference=DBZ0003A, PackageVersion="revB, Mar-2003", PinCount=3, RevisionNote="Component URLs added", RoHS=N
R29: library part CMP-066-000223-2, "RES 1.0Mohm  ±1% 0.125W 2012 (0805 INCH)", Manufacturer=Yageo, Manufacturer Number=RC0805FR-071ML, Power=0.125W, Supplier Part Number 1="FAB.0805_R 1M", TemperatureCoeff=±200ppm/°C, TemperatureRange="-55°C to 155°C", Tolerance=±1%, Voltage=150V, Category=Passives, IsStocked=1, PN=PN-531908, SubCategory="Resistances couche epaisse", Supplier 1=ETML, Supplier Price 1=0.0200
R31: library part CMP-066-000214-2, "RES 180kohm  ±1% 0.125W 2012 (0805 INCH)", Manufacturer=Yageo, Manufacturer Number=RC0805FR-07180KL, Power=0.125W, Supplier Part Number 1="FAB.0805_R 180k", TemperatureCoeff=±200ppm/°C, TemperatureRange="-55°C to 155°C", Tolerance=±1%, Voltage=150V, Category=Passives, IsStocked=1, PN=PN-810533, SubCategory="Resistances couche epaisse", Supplier 1=ETML, Supplier Price 1=0.0200
R32: library part Trimmer250K, "TRIMMER 250K OHM 0.5W PC PIN TOP", Manufacturer=Bourns, Manufacturer Part Number=3296W-1-254LF, Package=3296W, Power Rating=0.5W, Resistance=250kΩ, Temperature="-55°C to +125°C", Temperature Coefficient=100ppm/°C, Temperature Range High=+125°C, Temperature Range Low=-55°C, Tolerance=10%, Voltage Rating=300V, Automotive=No, Category=Res, ComponentLink2Description=Datasheet, ComponentLink2URL=https://www.bourns.com/data/global/pdfs/3296.pdf, Device Class L1="Passive Components", Device Class L2=Resistors, Device Class L3="Variable Resistors and Potentiometers", Digikey Description="TRIMMER 250K OHM 0.5W PC PIN TOP", Height=12.05mm, Lead Free=Yes, Mouser Description="Res Cermet Trimmer 250K Ohm 10% 1/2W 25(Elec)Turn 2.19mm (9.53 X 4.83 X 11.55mm) Pin Thru-Hole Tube", Octopart=https://octopart.com/3296w-1-254lf-bourns-574856, RoHS=TRUE, Series="Trimpot 3296-Sealed", Standoff Height=0.38mm
R33: library part CMP-066-000192-2, "RES 2.7kohm  ±1% 0.125W 2012 (0805 INCH)", Manufacturer=Yageo, Manufacturer Number=RC0805FR-072K7L, Power=0.125W, Supplier Part Number 1="FAB.0805_R 2k7", TemperatureCoeff=±200ppm/°C, TemperatureRange="-55°C to 155°C", Tolerance=±1%, Voltage=150V, Category=Passives, IsStocked=1, PN=PN-891617, SubCategory="Resistances couche epaisse", Supplier 1=ETML, Supplier Price 1=0.0200
R35: library part CMP-00252-16640727-1, "BZV55C5V6 Diode Zener Single 5.6V 2% 3.33mW 2-Pin MELF DO-213AA Bag", Max Operating Temperature=175°C, Min Operating Temperature=-65°C, Test Current=5mA, Tolerance=7%, Zener Voltage=5.6V, Element Configuration=Single, Lifecycle Status=Production, Mount="Surface Mount", NexarPartId=16640727, Number of Pins=2, RoHS=Non-Compliant, Voltage Tolerance=7%
R37: library part CMP-066-000196-2, "RES 5.6kohm  ±1% 0.125W 2012 (0805 INCH)", Manufacturer=Yageo, Manufacturer Number=RC0805FR-075K6L, Power=0.125W, Supplier Part Number 1="FAB.0805_R 5k6", TemperatureCoeff=±200ppm/°C, TemperatureRange="-55°C to 155°C", Tolerance=±1%, Voltage=150V, Category=Passives, IsStocked=1, PN=PN-467784, SubCategory="Resistances couche epaisse", Supplier 1=ETML, Supplier Price 1=0.0200
R38: library part CMP-066-000155-2, "RES 2.2ohm  ±1% 0.125W 2012 (0805 INCH)", Manufacturer=Yageo, Manufacturer Number=RC0805FR-072R2L, Power=0.125W, Supplier Part Number 1="FAB.0805_R 2R2", TemperatureCoeff=±200ppm/°C, TemperatureRange="-55°C to 155°C", Tolerance=±1%, Voltage=150V, Category=Passives, IsStocked=1, PN=PN-537077, SubCategory="Resistances couche epaisse", Supplier 1=ETML, Supplier Price 1=0.0200
R39: library part CMP-066-000198-2, "RES 8.2kohm  ±1% 0.125W 2012 (0805 INCH)", Manufacturer=Yageo, Manufacturer Number=RC0805FR-078K2L, Power=0.125W, Supplier Part Number 1="FAB.0805_R 8k2", TemperatureCoeff=±200ppm/°C, TemperatureRange="-55°C to 155°C", Tolerance=±1%, Voltage=150V, Category=Passives, IsStocked=1, PN=PN-705867, SubCategory="Resistances couche epaisse", Supplier 1=ETML, Supplier Price 1=0.0200
R40 R47: library part CMP-066-000217-2, "RES 330kohm  ±1% 0.125W 2012 (0805 INCH)", Manufacturer=Yageo, Manufacturer Number=RC0805FR-07330KL, Power=0.125W, Supplier Part Number 1="FAB.0805_R 330k", TemperatureCoeff=±200ppm/°C, TemperatureRange="-55°C to 155°C", Tolerance=±1%, Voltage=150V, Category=Passives, IsStocked=1, PN=PN-717658, SubCategory="Resistances couche epaisse", Supplier 1=ETML, Supplier Price 1=0.0200
R41 R46: "HLMP-1790 2V 2mA", Supplier Part Number 1="MAG 355.161", IsStocked=1, PN="MAG 355.161", Supplier 1=ETML, Supplier Price 1=0.00
R43: library part CMP-066-000193-2, "RES 3.3kohm  ±1% 0.125W 2012 (0805 INCH)", Manufacturer=Yageo, Manufacturer Number=RC0805FR-073K3L, Power=0.125W, Supplier Part Number 1="FAB.0805_R 3k3", TemperatureCoeff=±200ppm/°C, TemperatureRange="-55°C to 155°C", Tolerance=±1%, Voltage=150V, Category=Passives, IsStocked=1, PN=PN-560659, SubCategory="Resistances couche epaisse", Supplier 1=ETML, Supplier Price 1=0.0200
R44: library part CMP-066-000178-2, "RES 180ohm  ±1% 0.125W 2012 (0805 INCH)", Manufacturer=Yageo, Manufacturer Number=RC0805FR-07180RL, Power=0.125W, Supplier Part Number 1="FAB.0805_R 180R", TemperatureCoeff=±200ppm/°C, TemperatureRange="-55°C to 155°C", Tolerance=±1%, Voltage=150V, Category=Passives, IsStocked=1, PN=PN-125035, SubCategory="Resistances couche epaisse", Supplier 1=ETML, Supplier Price 1=0.0200
U1 U2 U3 U4: library part CMP-063-000019-1, "Plated Hole  3.2mm", Category=Others, IsStocked=False, PN=PN-781782, SubCategory=Mecaniques
X1: library part CMP-054-000001-1, "Embase 4mm PCB 16A 60VDC Sn Red", Current=16A, Dielectric=PC, Manufacturer="SKS Kontakttechnik GmbH", Manufacturer Number=973582101, Supplier Part Number 1=MAG.277.666, TemperatureRange="-25°C to +85°C", Voltage=60VDC, Category=Connectors, IsStocked=True, PN=PN-628499, SubCategory=Laboratoire, Supplier 1=ETML, Supplier Price 1=1.7
X2: library part CMP-054-000000-1, "Embase 4mm PCB 16A 60VDC Sn Black", Current=16A, Dielectric=PC, Manufacturer="SKS Kontakttechnik GmbH", Manufacturer Number=973582100, Supplier Part Number 1=MAG.277.665, TemperatureRange="-25°C to +85°C", Voltage=60VDC, Category=Connectors, IsStocked=True, PN=PN-390416, SubCategory=Laboratoire, Supplier 1=ETML, Supplier Price 1=1.51
X3 X6 X7: library part CMP-054-000017-1, "JUMPER 2.54 1x03", Current=3A, Manufacturer="Würth Electronik", Manufacturer Number=61303611121, Supplier Part Number 1=MAG.283.897, TemperatureRange="-40°C to +105 °C", Voltage=250VAC, Category=Connectors, IsStocked=True, PN=PN-771444, SubCategory=Jumpers, Supplier 1=ETML, Supplier Price 1=0.06
X4 X11 X12 X14 X15 X16 X17 X18: library part CMP-054-000004-1, "TEST THT MINIATURE WT", Manufacturer=Keystone, Supplier Part Number 1=MAG.428.013, Category=Connectors, IsStocked=True, Manufacturer Number=5002, PN=PN-357949, SubCategory=Testpoints, Supplier 1=ETML, Supplier Price 1=0.2931
X5 X13: library part CMP-055-000006-1, "PIN HEADER 2.54 1x02", Current=3A, Manufacturer="Würth Electronik", Manufacturer Number=61300211121, Supplier Part Number 1=MAG.283.897, TemperatureRange="-40°C to +105°C", Voltage=250V, Category=Connectors, IsStocked=True, PN=PN-573903, SubCategory="Pin Header", Supplier 1=ETML, Supplier Price 1=0.04
X10: library part CMP-054-000003-1, "TEST THT MINIATURE BK", Manufacturer=Keystone, Supplier Part Number 1=MAG.428.011, Category=Connectors, IsStocked=True, Manufacturer Number=5001, PN=PN-688907, SubCategory=Testpoints, Supplier 1=ETML, Supplier Price 1=0.26

## Via types
v1: diameter 1.25, hole 0.711, Top Layer to Bottom Layer, 32 vias

## Nets (pads, with @x,y where several pads share a name; then routed paths per layer and width w, separated by ;. In a path a pad name is that pad's centre, name@x,y a point inside that pad or via, vN(x,y) a via of type N, cw(c..) or ccw(c..) an arc to the next point about the centre after c; other vN are vias at no path point)
GND: C3.1 C4.1 C5.1 C6.1 C7.2 C8.1 C9.1 C10.1 C11.1 C12.1 C14.1 C15.1 F2.3 K3.3 K4.1 K6.2 K7.2 K9.3 K9.6 R18.1 R19.1 R35.2 R36.1 R37.1 R42.2 R45.2 R46.K R47.1 X5.2 X6.3 X7.2 X9.1 X10.1 | length 260.3
  Top Layer w0.25: R42.2 7,16.552 v1(7.052,16.5) ; v1(16,13) X9.1 ; v1(20.27,24.44) C12.1 22.928,19.437 23,19.365 ; K9.3@21.275,19.365 23,19.365 ; K9.6 23,19.365 ; C14.1@29.429,17.691 29.771,17.35 C14.1 30.229,17.35 30.571,17.691 30.571,17.921 31.243,18.593 31.843,18.593 v1(32,18.75) 32.12,18.87 32.795,18.87 34.482,20.557 34.703,20.557 34.9,20.755 R45.2 ; R47.1 30,29.491 v1(30.009,29.5) ; C15.1 33.537,14.825 33.879,14.484 33.879,14.121 v1(35.25,12.75) ; C5.1 46.707,14.825 v1(46.75,14.868) ; R35.2 60.16,43.41 60.69,43.94 60.69,44.027 61.164,44.5 R36.1 61.25,41.989 v1(63.239,40) ; v1(71.5,38.5) C8.1 ; v1(76.75,37) C7.2 ; v1(81.75,42) 81.941,42.191 81.941,42.666 83.19,43.915 83.19,44.002 83.664,44.475 R37.1 ; C11.1 88.95,50.02 87.9,51.07 87.9,52.15 v1(89,53.25) ; v1(89,40) 88.95,40.05 K7.2 K6.2 94.626,44.6 v1(97.226,42) ; v1(98.372,55.25) C9.1 100.525,55.021 100.184,54.679 99.954,54.679 99.175,53.9 K4.1 ; C10.1 106.975,40.525 v1(107,40.5) ; C6.1@111.175,49.37 C6.1 112.606,49.095 v1(112.75,48.951) ; v1(120.14,50.25) R19.1 ; R18.1 136.75,63.76 v1(136.76,63.75)
  Top Layer w0.75: v1(11.537,37.5) F2.3 32,40 52.25,19.75 82.419,19.75 84.669,17.5 103.099,17.5 130.956,45.356 130.956,56.044 127.81,59.19 K3.3 ; C3.1 65.232,26.982 v1(65.25,27) ; v1(107,81.75) C4.1
NetC1_1: C1.1 C4.2 K1.2 K2.2 R5.1 R6.2 R7.2 R8.2 R9.2 R10.2 | length 203.3
  Top Layer w0.25: C1.1 66.825,70.325 68.54,72.04 K1.2 ; 107.874,31.374 108.597,30.651 R6.2@109.599,30.651 ; R5.1 138.5,77.25 138.5,92.5 137.029,93.971 136.109,93.971 R10.2
  Top Layer w0.75: K1.2 71.77,92.23 85.27,92.23 88,89.5 107,89.5 ; K2.2 100,23.5 107.874,31.374 117.75,41.25 117.75,94.08 ; C4.2 107,89.5 ; R6.2@109.599,30.651 R6.2 ; R10.2 R9.2 R8.2 R7.2 117.75,94.08 ; 107,89.5 108.67,89.5 113.25,94.08 117.75,94.08
NetC1_2: C1.2 R1.2 | length 2.7
  Top Layer w0.25: R1.2 69.175,66.035 C1.2
NetC2_1: C2.1 F1.2 F2.2@9.257,46.15 | length 32.1
  Top Layer w0.25: F2.2@8.75,46.15 9.257,46.15 18.9,46.15 22,49.25 C2.1
  Top Layer w0.75: F1.2 3.75,54.53 7.694,50.586 7.694,47.206 F2.2@8.75,46.15
NetC2_2: C2.2 K1.3 R2.1 R3.1 R4.1 X1.1 X3.1 X4.1 | length 152.1
  Top Layer w0.25: C2.2 22,54.5 24.5,57 X3.1
  Top Layer w0.75: X1.1@3,85 21,85 31.048,74.952 ; X4.1 R3.1 ; X3.1 39.38,61.08 R3.1 ; R2.1 57.03,68.08 54.11,71 40.88,71 39.38,69.5 R4.1 ; K1.3 45.095,89 31.048,74.952 ; 31.048,74.952 37.64,68.36 R4.1 ; R3.1 R4.1
NetC5_2: C5.2 R14.2 R14.3 R38.2 X8.1 | length 22.4
  Top Layer w0.25: R38.2@37.607,17 R38.2 X8.1 44.488,17 45.773,18.285 52.938,18.285 R14.3 55.755,15.468 R14.2
NetC6_2: C6.2 K4.5 | length 4.7
  Top Layer w0.25: K4.5@104.364,49.095 C6.2
NetC7_1: C7.1 C8.2 C9.2 K4.8 K10.3 R20.2 R23.2 R24.2 R26.2 R28.2 R33.2 X15.1 | length 71.8
  Top Layer w0.25: K10.3@65,50 68.625,50 R20.2 ; C8.2@72.071,46.566 C8.2@71.729,46.225 ; X15.1 R24.2 72.75,53.375 69.828,50.453 69.828,50.125 69.328,49.625 R20.2 ; C7.1 76.225,46.225 C8.2@71.729,46.225 ; K4.8 104.666,53.064 104.666,53.459 103.446,54.679 103.216,54.679 102.875,55.021 C9.2 102.617,55.508 102.617,56.133 102,56.75 98.5,56.75 96.5,54.75 88,54.75 86.5,53.25 R26.2 R23.2 82.601,51.25 81.726,50.375 74.75,50.375 73.143,48.768 73.143,48.547 72.945,48.35 R28.2 72.505,48.35 72.307,48.153 72.307,47.932 71.5,47.125 C8.2 ; R20.2 R33.2 71.325,46.05 C8.2 ; C8.2 C8.2@71.729,46.225
NetC10_2: C10.2 K4.4 K6.3 R25.2 R26.1 X16.1 | length 34.1
  Top Layer w0.25: R26.1 86.586,49.25 87.06,48.777 87.06,48.69 87.75,48 96.25,48 ; K6.3 96.275,47.975 96.25,48 ; X16.1 C10.2 R25.2 103.231,45.5 100.156,48.575 100.156,48.942 100.003,49.095 99.636,49.095 98,49.095 96.905,48 96.25,48
NetC11_2: C11.2 K4.2 K4.6 R32.1 R32.2 X7.1 | length 80.8
  Top Layer w0.25: C11.2 90.419,51.52 91.049,52.15 94.123,52.15 94.173,52.1 97.123,52.1 97.129,52.106 98.372,52.106 98.843,51.635 101.48,51.635 102.115,51 ; v1(103.573,47.5) 102.115,48.958 102.115,51 ; K4.6@104.364,50.365 102.75,50.365 102.115,51 ; R32.2 R32.1 X7.1
  Bottom Layer w0.25: v1(103.573,47.5) 112.727,47.5 115.627,44.6 129.82,44.6 X7.1
NetC12_2: C12.2 K8.2 K9.8 R40.2 X17.1 | length 21.1
  Top Layer w0.25: K8.2 15.9,25.34 R40.2 16.31,25.75 24.004,25.75 ; X17.1 24.004,25.75 ; K9.8 26.725,21.905 26.725,23.44 25.982,24.183 25.535,24.183 C12.2 25.278,24.68 24.937,25.021 24.733,25.021 24.004,25.75
NetC13_1: C13.1 K9.4 | length 2.4
  Top Layer w0.25: C13.1@19,18.285 19.19,18.095 K9.4@21.275,18.095
NetC13_2: C13.2 K9.2 | length 2.3
  Top Layer w0.25: C13.2@19,20.635 K9.2@21.275,20.635
NetC14_2: C14.2 K9.5 R44.1 | length 10.3
  Top Layer w0.25: K9.5@26.725,18.095 27.063,18.095 27.238,17.92 27.238,17.582 29.419,15.401 29.419,15.341 29.761,15 29.429,14.669 29.429,14.429 29,14 29,11.08 29.44,10.64 29.44,10.553 29.914,10.08 R44.1
NetC15_2: C15.2 R38.1 R43.2 R44.2 R45.3 X8.2 X18.1 | length 34.6
  Top Layer w0.25: R45.3 34,23.305 34.197,23.107 34.763,23.107 36.759,21.112 37.656,21.112 R43.2 37.687,19.972 36,18.285 36,17.24 ; X18.1 36,7 30.929,12.071 30.009,12.071 R44.2 30.086,12.08 30.56,12.553 30.56,12.64 32,14.08 32,16 33.175,17.175 C15.2 35.935,17.175 36,17.24 ; X8.2 R38.1 37.876,15.124 37.071,15.124 36,16.195 36,17.24
NetF1_1: F1.1 X2.1 | length 33.2
  Top Layer w0.75: X2.1@3,73.346 21,73.346 21,65.596 F1.1
NetF2_1: F2.1 R12.2 | length 8
  Top Layer w0.25: R12.2 4,34.5 6.977,37.477 F2.1
NetK1_1: K1.1 R1.1 R2.2 | length 41.5
  Top Layer w0.25: 66.825,63 R1.1@66.825,65.685
  Top Layer w0.75: R2.2 62.955,65.54 65.495,63 66.825,63 69.652,63 71.08,64.428 K1.1 ; R1.1@66.825,65.685 R1.1
NetK2_1: K2.1 R6.1 R14.1 | length 60.6
  Top Layer w0.25: K2.1 111.75,29.147 R6.1
  Bottom Layer w0.25: R14.1 64.048,12.25 81.812,12.25 86.643,17.081 99.684,17.081 K2.1
NetK3_1: K3.1 R16.1 R19.2 | length 14.6
  Top Layer w0.25: R19.2 R16.1 123.25,53.75 K3.1@123.25,63.725
NetK3_2: K3.2@125.53,68.9 R7.1 R8.1 R9.1 R10.1 R13.1 R18.2 | length 36.9
  Top Layer w0.25: K3.2@126,68.5 R13.1 R18.2@134.75,66.5
  Top Layer w0.75: R7.1 R8.1 ; K3.2@125.53,68.586 K3.2@125.53,68.9 ; K3.2@126,68.5 R8.1 ; R10.1 R9.1 R8.1
NetK4_3: K4.3 R16.2 R17.1 R30.2 | length 43.5
  Top Layer w0.25: R30.2 v1(96.75,49.25) 96.875,49.25 98,50.375 99.626,50.375 K4.3@99.636,50.365 ; v1(124.75,47.25) R16.2 R17.1
  Bottom Layer w0.25: v1(96.75,49.25) 97.75,50.25 114.75,50.25 117.75,47.25 v1(124.75,47.25)
NetK5_1: K5.1 R12.1 R21.1 R35.1 | length 86.8
  Top Layer w0.25: R12.1 6.977,31.25 14.127,38.4 31.6,38.4 v1(44.5,25.5) ; v1(48,29) 55.75,36.75 55.75,45.09 56.877,46.217 56.877,46.515 R35.1@57.452,47.09 ; R21.1 56.25,48.59 56.877,47.963 56.877,47.665 R35.1@57.452,47.09 ; K5.1 63.85,44.695 63.653,44.893 63.432,44.893 62.95,45.375 60.315,45.375 58.994,46.697 58.143,46.697 R35.1 R35.1@57.452,47.09
  Bottom Layer w0.25: v1(44.5,25.5) v1(48,29)
NetK5_2: K5.2 R33.1 R36.2 | length 8.9
  Top Layer w0.25: R36.2 63.625,46.5 65.232,44.893 65.453,44.893 65.65,44.695 K5.2 68.575,44.475 R33.1
NetK5_3: K5.3 R27.1 | length 4.4
  Top Layer w0.25: R27.1 61.836,50 62.31,49.527 62.31,49.44 64.32,47.43 64.553,47.43 64.75,47.233 K5.3
NetK6_1: K6.1 K7.3 R23.1 R29.1 | length 14.9
  Top Layer w0.25: R29.1 R23.1 84.899,49.25 86.774,47.375 89.625,47.375 91.082,45.918 91.082,45.697 91.28,45.5 K7.3 92.825,45.5 93.307,45.982 93.307,46.203 93.505,46.4 K6.1
NetK7_1: K7.1 R34.2 | length 3.3
  Top Layer w0.25: R34.2 86.586,44.5 87.06,44.973 87.06,45.06 88.257,46.257 88.807,46.257 K7.1
NetK8_1: K8.1 R39.2 R41.A | length 16.1
  Top Layer w0.25: R41.A 10.005,18.36 R39.2 10.086,18.365 10.56,18.838 10.56,18.925 11,19.365 11,21.543 12.798,23.34 12.805,23.34 13.005,23.54 K8.1
NetK9_1: K9.1 R40.1 X9.2 | length 8.9
  Top Layer w0.25: X9.2 R40.1 18.465,23.44 20,21.905 K9.1@21.275,21.905
NetK10_1: K10.1 R22.1 R27.2 | length 8.5
  Top Layer w0.25: R22.1 59.179,50.179 59.929,50.179 61.19,51.44 61.19,51.527 61.664,52 R27.2 61.864,52 62.589,51.275 65.225,51.275 65.625,51.675 65.675,51.675 65.95,51.95 K10.1@65.95,52
NetR5_2: R5.2 R11.2 X12.1 X13.1 | length 18.2
  Top Layer w0.25: R11.2 R5.2 145.71,73.5 X13.1 X12.1
NetR11_1: R11.1 R13.2 X13.2 X14.1 | length 20.1
  Top Layer w0.25: R11.1 135.164,70.586 135.164,70.172 136.75,68.586 R13.2 145.75,68.5 ; X14.1 145.75,68.5 ; X13.2 145.75,68.5
NetR17_2: R17.2 X5.1 | length 20.1
  Top Layer w0.25: R17.2 v1(129.25,52.25)
  Bottom Layer w0.25: v1@129.091,52.25 142.35,52.25 X5.1
NetR24_1: R24.1 R28.1 R29.2 R31.2 | length 13.2
  Top Layer w0.25: R28.1 72.945,50.15 73.143,50.347 73.143,50.568 74.75,52.175 74.75,54.664 75.223,54.19 75.31,54.19 77.69,51.81 77.69,51.723 78.164,51.25 R31.2 R29.2
NetR25_1: R25.1 X6.2 | length 38.5
  Top Layer w0.25: R25.1 v1(116,45.5)
  Bottom Layer w0.25: v1(116,45.5) 142.25,45.5 143,44.75 X6.2
NetR28_3: R28.3 R31.1 R34.1 R37.2 | length 12
  Top Layer w0.25: R28.3@75.7,49.2 78.2,49.2 R31.1 78.336,49.25 78.81,48.777 78.81,48.69 81.025,46.475 R37.2 86.475,46.475 R34.1
NetR30_1: R30.1 R32.3 | length 77.9
  Top Layer w0.25: R30.1 v1(93.75,51.25)
  Bottom Layer w0.25: v1(93.75,51.25) 93.75,34.69 98.19,30.25 130.665,30.25 R32.3
NetR41_K: R41.K R46.A | length 5.2
  Top Layer w0.25: R41.K R46.A
NetR43_1: R43.1 R45.1 R47.2 | length 11.9
  Top Layer w0.25: R47.2 32.903,20.62 33.1,20.818 R45.1 33.1,24.129 33.346,24.375 36.392,24.375 37.128,23.64 37.128,23.553 37.601,23.08 R43.1 R43.1@37.572,22.965
VIN: C3.2 K2.3 K8.3 K10.2 R2.3 R3.2 R4.2 R20.1 R21.2 R22.2 R39.1 R42.1 X3.2 X11.1 | length 201.6
  Top Layer w0.25: 7,24.734 R42.1 8.49,21.875 9.44,20.925 9.44,20.838 9.914,20.365 R39.1 10,23.936 10.275,24.211 10.275,24.22 10.495,24.44 K8.3 ; 56.25,54.664 R21.2 R22.2 59.086,52 59.56,52.473 59.56,52.56 60.25,53.25 62.85,53.25 63.407,52.693 63.903,52.693 64.05,52.545 K10.2@64.05,52.406 ; K10.2 64.1,52.495 64.297,52.693 64.518,52.693 65.2,53.375 R20.1
  Top Layer w0.75: 7,24.734 7,30 14,37 v1(17.5,37) ; v1(17.5,41.75) 17.5,41.885 17.75,42.135 17.75,42.321 29.117,53.687 34,53.687 ; X11.1 34,53.687 ; 54.08,59.5 R3.2 R4.2 ; 54.316,63 R2.3 ; 56.25,54.664 56.25,57.25 54,59.5 48.5,59.5 X3.2 46,53.687 ; C3.2 65.232,21.08 ; K2.3 84.813,19.937 83.67,21.08 65.232,21.08 ; 34,53.687 46,53.687 ; 46,53.687 46,28.5 53.42,21.08 65.232,21.08
  Bottom Layer w0.75: v1(17.5,37) v1(17.5,41.75)
pads on no net: F2.2@8.007,44.4 F2.2@8.007,47.9 F2.2@10.507,44.4 F2.2@10.507,47.9 K1.0 K2.0 K3.2@124.28,67.15 K3.2@124.28,70.65 K3.2@126.78,67.15 K3.2@126.78,70.65 K4.7 K9.7 U1.1 U2.1 U3.1 U4.1 X3.3 X6.1 X7.3

## Polygon pours and split planes (outlines as drawn)
NetC2_1 on Top Layer "NETC2_1_L01_P002" (solid, pour order 2): 2.477,43 2.477,54.348 3.13,55 15.727,55 16.227,54.5 16.227,43 15.977,42.75 2.678,42.75
NetK3_2 on Top Layer "NETK3_2_L01_P001" (solid, pour order 1): 118.75,65.75 118.75,77.098 119.402,77.75 132,77.75 132.5,77.25 132.5,65.75 132.25,65.5 118.951,65.5
GND on Bottom Layer "GND_L02_P000" (solid, remove dead copper, pour order 0): 1,98.5 1.5,99 158.5,99 159,98.5 159,1.5 158.5,1 1.5,1 1,1.5

## Other copper
Top Layer:
  text "1" at 9,1.5 h1.52
  text ".PcbNumber" at 15.9,1.5 h1.52
Bottom Layer:
  text "2" at 10.5,1.5 h1.52
  text ".PcbNumber" at 32.5,1.5 h1.52

## Silkscreen, mask and mechanical layers (free items; w line width, h text height)
Top Overlay:
  circle w0.254: c152.75,72 r2.524
  lines w0.254: 33.364,41.975 51.614,41.975 ; 40.209,39.5 40.209,47.25 51.614,47.25 51.614,44.485 ; 45.75,39.5 45.75,47.25 ; 147.595,71 149.051,71 149.051,68 152.75,68 ; 147.595,73.5 149.051,73.5 149.051,76.612 152.75,76.612 ; 148.25,63.25 152.75,63.25 152.75,69.5 ; 148.25,80.25 152.75,80.25 152.75,74.5 ; 151.75,72.75 152.75,70.5 153.75,72.75 ; 33.364,39.5 51.614,39.5 51.614,44.615 33.364,44.615 33.364,39.5
  text "+3.3-30V" at 25.004,84.004 h1.52
  text "MAX 1.9A" at 25.508,81.004 h1.52
  text "0V" at 25.254,72.254 h1.52
  text "Fusible 2A" at 6.754,66.254 h1.52
  text "100mV = 1A" at 157.746,65.004 h1.52 r90
  text "GND" at 147.804,52.254 h1.52
  text "Trig" at 155.488,51.504 h1.52 r90
  text "OFF" at 45.496,50.433 h1.52 r90
  text "ON" at 47.996,50.433 h1.52 r90
  text "Booster" at 41.254,48.254 h1.52
  text "OFF" at 41.118,45.254 h1.52
  text "ON" at 46.984,45.254 h1.52
  text "ON" at 148.504,43.004 h1.52
  text "Umin" at 33.918,42.604 h1.52
  text "3V3" at 41.118,42.604 h1.52
  text "5V" at 46.868,42.604 h1.52
  text "Pmax" at 34.043,39.954 h1.52
  text "18W" at 41.118,39.954 h1.52
  text "50W" at 46.868,39.954 h1.52
  text "OFF" at 148.504,39.754 h1.52
  text "Courant" at 155.996,38.004 h1.52 r90
  text "ON" at 147.809,32.254 h1.52
  text "Desactiver / Booster / si Uin<8V" at 33.364,31.75 h1.52
  text "OFF" at 147.809,29.254 h1.52
  text "Clock" at 155.996,28.174 h1.52 r90
  text "Frequence" at 156.238,12.754 h1.52 r90
  text "GND" at 45.854,4.303 h1.52
Drill Drawing:
  circle w0.254: c184.615,121.683 r0.508
  circle w0.254: c184.615,121.683 r0.847
  circle w0.254: c184.615,110.253 r0.847